# Altium PCB STM32F103ZET6.PCBDOC (part 5 of 5)
Units mil, origin at the board's own origin, x right, y up, seen from the top; angles counter-clockwise.
Board outline 7118.03 x 3660.03 mil, 2 copper layers (Top Layer, Bottom Layer); 158 components, 198 nets, 727 pads, 128 vias.
Unrouted connection lines stored in the file: 5.
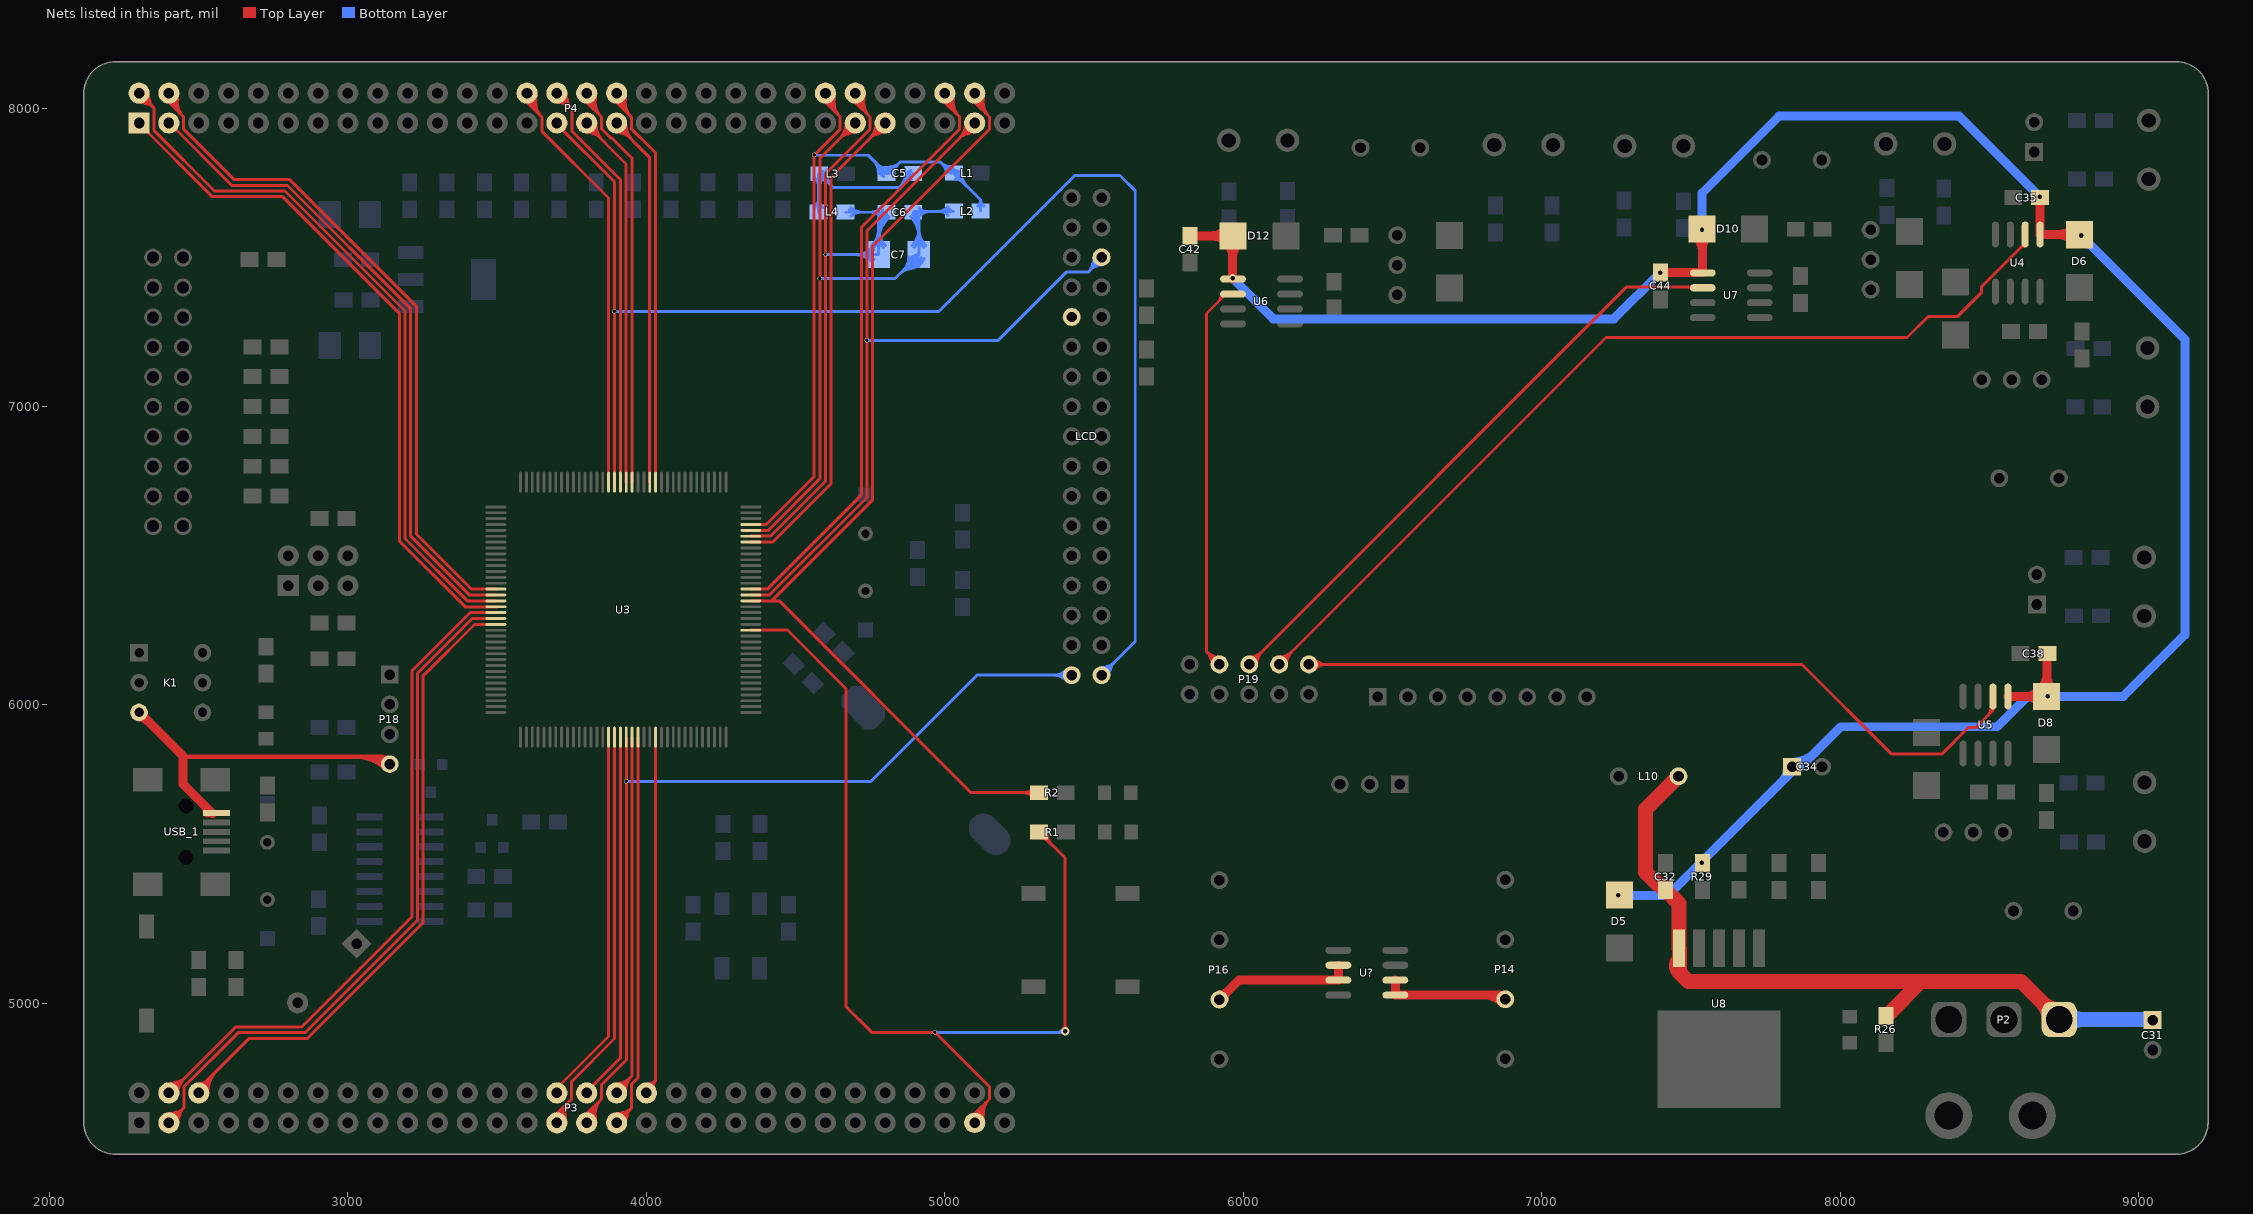
[diagram p5: the nets of this part, all layers, seen from the top]

## Via types
v1: diameter 15, hole 12, Top Layer to Bottom Layer, 57 vias
v2: diameter 28, hole 15, Top Layer to Bottom Layer, 53 vias
v3: diameter 50, hole 28, Top Layer to Bottom Layer, 10 vias
v4: diameter 12, hole 10, Top Layer to Bottom Layer, 4 vias
v5: diameter 20, hole 15, Top Layer to Bottom Layer, 2 vias
v6: diameter 48, hole 28, Top Layer to Bottom Layer, 1 vias
v7: diameter 40, hole 28, Top Layer to Bottom Layer, 1 vias

## Nets (pads, with @x,y where several pads share a name; then routed paths per layer and width w, separated by ;. In a path a pad name is that pad's centre, name@x,y a point inside that pad or via, vN(x,y) a via of type N, cw(c..) or ccw(c..) an arc to the next point about the centre after c; other vN are vias at no path point) (continued)
PF5: P3.57 R1.2 U3.15 | length 4291.4
  Top Layer w10: U3.15@4351,6251 4472.57,6251 4668,6055.57 4668,4989.83 4754.83,4903 v1(4966,4903) 4966.91,4903 5149.43,4720.48 5149.43,4679.52 ; P3.57@5100,4600 5100,4630.09 5149.43,4679.52 ; P3.57@5103.04,4598.9 ccw(c5063.09,4639.81) 5120.27,4639.14 ; P3.57@5110.03,4591.75 ccw(c5063.9,4638.98) 5129.92,4638.2 ; R1.2@5316,5574 5403,5487 v2@5403,4909 ; R1.2@5321,5574 cw(c5309.75,5535.44) 5348.55,5545.84 ; R1.2@5323.8,5583.6 cw(c5315.57,5555.4) R1.2@5343.95,5563 ; v2@5396.64,4913.36 ccw(c5381.27,4928.73) 5403,4928.73 ccw(c5424.73,4928.73) v2@5409.36,4913.36 ; v2@5403,4903 v2(5403,4907) ; 5149.43,4679.52 ccw(c5203.13,4625.82) 5129.55,4607.04 cw(c5203.13,4625.82) 5149.43,4679.52 ; v1@4966,4900.5 cw(c4966,4892.27) 4971.82,4898.09 ccw(c4966,4892.27) v1@4966,4900.5 ; P3.57@5100.48,4599.62 cw(c5143.78,4610.67) 5112.18,4642.27 ccw(c5143.78,4610.67) P3.57@5100.48,4599.62 ; P3.57@5110.17,4602.09 cw(c5163.56,4615.72) 5124.6,4654.69 ccw(c5163.56,4615.72) P3.57@5110.17,4602.09 ; P3.57@5119.86,4604.57 cw(c5183.34,4620.77) 5137.01,4667.11 ccw(c5183.34,4620.77) P3.57@5119.86,4604.57 ; R1.2@5321,5554 cw(c5321,5517.79) 5346.61,5543.39 ccw(c5321,5517.79) R1.2@5321,5554 ; R1.2@5331,5574 ccw(c5367.21,5574) 5341.61,5548.39 cw(c5367.21,5574) R1.2@5331,5574 ; R1.2@5341,5574 ccw(c5401.36,5574) 5358.68,5531.32 cw(c5401.36,5574) R1.2@5341,5574
  Bottom Layer w10: v1(4966,4903) 5398,4903 v2@5402,4907 ; 5371.62,4903 ccw(c5371.62,4938.38) v2@5396.64,4913.36
PF8: P4.58 R2.2 U3.20 | length 4002
  Top Layer w10: U3.20@4350,6349 4419.61,6349 4758,6687.39 4758,7538.09 5149.43,7929.52 5149.43,7970.48 ; 4422,6349 4445,6349 5088,5706 R2.2@5315,5706 ; P4.58@5100,8050 5100,8019.91 5149.43,7970.48 ; P4.58@5106.66,8056.87 cw(c5052.87,8001.4) 5130.13,8002.59 ; P4.58@5113.62,8064.05 cw(c5076.64,8025.91) 5129.76,8026.73 ; 5149.43,7970.48 cw(c5203.04,8024.09) 5129.51,8042.58 ccw(c5203.04,8024.09) 5149.43,7970.48 ; 5261.72,5706 cw(c5261.72,5657.72) 5295.86,5691.86 ccw(c5261.72,5657.72) 5261.72,5706 ; 5261.72,5706 ccw(c5261.72,5754.28) 5295.86,5720.14 cw(c5261.72,5754.28) 5261.72,5706 ; P4.58@5100.42,8049.89 ccw(c5143.26,8039.12) 5112.02,8007.88 cw(c5143.26,8039.12) P4.58@5100.42,8049.89 ; P4.58@5110.12,8047.46 ccw(c5163.19,8034.11) 5124.49,7995.42 cw(c5163.19,8034.11) P4.58@5110.12,8047.46 ; P4.58@5119.82,8045.02 ccw(c5183.11,8029.1) 5136.96,7982.95 cw(c5183.11,8029.1) P4.58@5119.82,8045.02
PF9: LCD.30 P4.57 U3.21 | length 3706.1
  Top Layer w10: U3.21@4349.89,6368.64 4350.25,6369 4412.74,6369 4739,6695.26 4739,7589 P4.57@5100,7950 ; 5060.98,7909.11 ccw(c5047.12,7960.83) P4.57@5099.58,7950.09 ; 5076.61,7913.3 ccw(c5064.85,7957.2) P4.57@5109.37,7948.08 ; 5048.05,7898.05 cw(c5100,7846.1) 5100,7919.57 ccw(c5100,7846.1) 5048.05,7898.05 ; 5048.05,7898.05 ccw(c4996.1,7950) 5069.57,7950 cw(c4996.1,7950) 5048.05,7898.05 ; 5065.12,7915.12 cw(c5100,7880.24) 5100,7929.57 ccw(c5100,7880.24) 5065.12,7915.12 ; 5065.12,7915.12 ccw(c5030.24,7950) 5079.57,7950 cw(c5030.24,7950) 5065.12,7915.12 ; v1@4736.23,7220.23 cw(c4729.55,7213.55) 4739,7213.55 ccw(c4729.55,7213.55) v1@4736.23,7220.23 ; v1@4736.23,7223.77 ccw(c4729.55,7230.45) 4739,7230.45 cw(c4729.55,7230.45) v1@4736.23,7223.77
  Bottom Layer w10: v1(4738,7222) 5178.87,7222 5406.87,7450 5480,7450 5525,7495 LCD.30@5525,7500 ; 5493.35,7472.79 cw(c5536.86,7461.97) LCD.30@5523.51,7504.77 ; 5503.67,7469.28 ccw(c5494.39,7503.93) LCD.30@5529.96,7499.36 ; 5480,7450 ccw(c5431.69,7498.32) 5500,7499.55 cw(c5431.69,7498.32) 5480,7450 ; 5490.86,7460.86 cw(c5525,7426.72) 5525,7475 ccw(c5525,7426.72) 5490.86,7460.86 ; 5496.65,7466.65 ccw(c5464.39,7498.91) 5510,7499.73 cw(c5464.39,7498.91) 5496.65,7466.65
PF10: P4.56 U3.22 | length 2602.9
  Top Layer w10: U3.22@4349,6388 4404.87,6388 4720,6703.13 4720,7600.09 5049.43,7929.52 5049.43,7970.48 ; P4.56@5000,8050 5000,8019.91 5049.43,7970.48 ; P4.56@5006.66,8056.87 cw(c4952.87,8001.4) 5030.13,8002.59 ; P4.56@5013.62,8064.05 cw(c4976.64,8025.91) 5029.76,8026.73 ; 5049.43,7970.48 cw(c5103.04,8024.09) 5029.51,8042.58 ccw(c5103.04,8024.09) 5049.43,7970.48 ; P4.56@5000.42,8049.89 ccw(c5043.26,8039.12) 5012.02,8007.88 cw(c5043.26,8039.12) P4.56@5000.42,8049.89 ; P4.56@5010.12,8047.46 ccw(c5063.19,8034.11) 5024.49,7995.42 cw(c5063.19,8034.11) P4.56@5010.12,8047.46 ; P4.56@5019.82,8045.02 ccw(c5083.11,8029.1) 5036.96,7982.95 cw(c5083.11,8029.1) P4.56@5019.82,8045.02
PF11: P4.34 U3.49 | length 1956
  Top Layer w10: P4.34@3900,8050 3900,8019.91 3949.43,7970.48 ; P4.34@3906.66,8056.87 cw(c3852.87,8001.4) 3930.13,8002.59 ; P4.34@3913.62,8064.05 cw(c3876.64,8025.91) 3929.76,8026.73 ; U3.49@4030.06,6746 4030.06,7850.94 3980.43,7900.57 3979.52,7900.57 3949.43,7930.66 3949.43,7970.48 ; 3949.43,7970.48 cw(c4003.04,8024.09) 3929.51,8042.58 ccw(c4003.04,8024.09) 3949.43,7970.48 ; P4.34@3900.42,8049.89 ccw(c3943.26,8039.12) 3912.02,8007.88 cw(c3943.26,8039.12) P4.34@3900.42,8049.89 ; P4.34@3910.12,8047.46 ccw(c3963.19,8034.11) 3924.49,7995.42 cw(c3963.19,8034.11) P4.34@3910.12,8047.46 ; P4.34@3919.82,8045.02 ccw(c3983.11,8029.1) 3936.96,7982.95 cw(c3983.11,8029.1) P4.34@3919.82,8045.02
PF12: P4.33 U3.50 | length 1685
  Top Layer w10: P4.33@3890.53,7948.65 ccw(c3932.31,7954.6) 3921.39,7913.84 ; P4.33@3900,7950 3900,7945 4011,7834 U3.50@4011,6746 ; P4.33@3900,7919.57 cw(c3900,7858.17) 3943.42,7901.58 ccw(c3900,7858.17) P4.33@3900,7919.57 ; P4.33@3900,7929.57 cw(c3900,7892.31) 3926.35,7918.65 ccw(c3900,7892.31) P4.33@3900,7929.57 ; P4.33@3920.43,7950 ccw(c3981.83,7950) 3938.42,7906.58 cw(c3981.83,7950) P4.33@3920.43,7950 ; P4.33@3930.43,7950 ccw(c4015.98,7950) 3955.49,7889.51 cw(c4015.98,7950) P4.33@3930.43,7950
PF13: P4.32 U3.53 | length 1966.9
  Top Layer w10: P4.32@3800,8050 3800,8019.91 3849.43,7970.48 ; P4.32@3806.66,8056.87 cw(c3752.87,8001.4) 3830.13,8002.59 ; P4.32@3813.62,8064.05 cw(c3776.64,8025.91) 3829.76,8026.73 ; U3.53@3952,6746 3952,7832 3883.43,7900.57 3879.52,7900.57 3849.43,7930.66 3849.43,7970.48 ; 3849.43,7970.48 cw(c3903.04,8024.09) 3829.51,8042.58 ccw(c3903.04,8024.09) 3849.43,7970.48 ; P4.32@3800.42,8049.89 ccw(c3843.26,8039.12) 3812.02,8007.88 cw(c3843.26,8039.12) P4.32@3800.42,8049.89 ; P4.32@3810.12,8047.46 ccw(c3863.19,8034.11) 3824.49,7995.42 cw(c3863.19,8034.11) P4.32@3810.12,8047.46 ; P4.32@3819.82,8045.02 ccw(c3883.11,8029.1) 3836.96,7982.95 cw(c3883.11,8029.1) P4.32@3819.82,8045.02
PF14: P4.31 U3.54 | length 1693.7
  Top Layer w10: P4.31@3790.53,7948.65 ccw(c3832.31,7954.6) 3821.39,7913.84 ; P4.31@3800,7950 3800,7945 3932,7813 U3.54@3932,6746 ; P4.31@3800,7919.57 cw(c3800,7858.17) 3843.42,7901.58 ccw(c3800,7858.17) P4.31@3800,7919.57 ; P4.31@3800,7929.57 cw(c3800,7892.31) 3826.35,7918.65 ccw(c3800,7892.31) P4.31@3800,7929.57 ; P4.31@3820.43,7950 ccw(c3881.83,7950) 3838.42,7906.58 cw(c3881.83,7950) P4.31@3820.43,7950 ; P4.31@3830.43,7950 ccw(c3915.98,7950) 3855.49,7889.51 cw(c3915.98,7950) P4.31@3830.43,7950
PF15: P4.30 U3.55 | length 1857.9
  Top Layer w10: P4.30@3690.76,8047.51 ccw(c3736.63,8059.87) 3725.6,8013.67 ; P4.30@3700,8050 3750,8000 3750,7922.87 3913,7759.87 U3.55@3913,6746 ; P4.30@3702.49,8059.24 cw(c3690.13,8013.37) 3736.33,8024.4 ; 3733.57,8016.43 cw(c3765.34,8048.2) 3720.43,8049.44 ccw(c3765.34,8048.2) 3733.57,8016.43 ; 3733.57,8016.43 ccw(c3701.8,7984.66) 3700.56,8029.57 cw(c3701.8,7984.66) 3733.57,8016.43 ; 3750,8000 cw(c3797.32,8047.32) 3730.42,8049.16 ccw(c3797.32,8047.32) 3750,8000 ; 3750,8000 ccw(c3702.68,7952.68) 3700.84,8019.58 cw(c3702.68,7952.68) 3750,8000
PG0: LCD.2 P4.29 U3.56 | length 5298.5
  Top Layer w10: P4.29@3700,7950 3700,7946 3893,7753 U3.56@3893,6747
  Bottom Layer w10: v1(3893,7319) 4980,7319 5435,7774 5587,7774 5638,7723 5638,6213 LCD.2@5525,6100 ; LCD.2@5520.1,6101 cw(c5558.94,6093.05) 5548.68,6131.35 ; LCD.2@5526,6095.1 ccw(c5518.05,6133.94) 5556.35,6123.68 ; 5550.61,6125.61 cw(c5525,6151.21) 5525,6115 ccw(c5525,6151.21) 5550.61,6125.61 ; 5550.61,6125.61 ccw(c5576.21,6100) 5540,6100 cw(c5576.21,6100) 5550.61,6125.61 ; 5567.68,6142.68 cw(c5525,6185.36) 5525,6125 ccw(c5525,6185.36) 5567.68,6142.68 ; 5567.68,6142.68 ccw(c5610.36,6100) 5550,6100 cw(c5610.36,6100) 5567.68,6142.68
PG1: P4.28 U3.57 | length 2014.7
  Top Layer w10: P4.28@3600,8050 3600,8019.91 3649.43,7970.48 ; P4.28@3606.66,8056.87 cw(c3552.87,8001.4) 3630.13,8002.59 ; P4.28@3613.62,8064.05 cw(c3576.64,8025.91) 3629.76,8026.73 ; U3.57@3873,6746 3873,7699 3649.43,7922.57 3649.43,7970.48 ; 3649.43,7970.48 cw(c3703.04,8024.09) 3629.51,8042.58 ccw(c3703.04,8024.09) 3649.43,7970.48 ; P4.28@3600.42,8049.89 ccw(c3643.26,8039.12) 3612.02,8007.88 cw(c3643.26,8039.12) P4.28@3600.42,8049.89 ; P4.28@3610.12,8047.46 ccw(c3663.19,8034.11) 3624.49,7995.42 cw(c3663.19,8034.11) P4.28@3610.12,8047.46 ; P4.28@3619.82,8045.02 ccw(c3683.11,8029.1) 3636.96,7982.95 cw(c3683.11,8029.1) P4.28@3619.82,8045.02
PG2: P4.4 U3.87 | length 2871.4
  Top Layer w10: P4.4@2400,8050 2400,8019.91 2449.43,7970.48 ; P4.4@2406.66,8056.87 cw(c2352.87,8001.4) 2430.13,8002.59 ; P4.4@2413.62,8064.05 cw(c2376.64,8025.91) 2429.76,8026.73 ; U3.87@3497,6388 3414.3,6388 3229,6573.3 3229,7335.91 2804.91,7760 2618.87,7760 2449.43,7929.44 2449.43,7970.48 ; 2449.43,7970.48 cw(c2503.04,8024.09) 2429.51,8042.58 ccw(c2503.04,8024.09) 2449.43,7970.48 ; P4.4@2400.42,8049.89 ccw(c2443.26,8039.12) 2412.02,8007.88 cw(c2443.26,8039.12) P4.4@2400.42,8049.89 ; P4.4@2410.12,8047.46 ccw(c2463.19,8034.11) 2424.49,7995.42 cw(c2463.19,8034.11) P4.4@2410.12,8047.46 ; P4.4@2419.82,8045.02 ccw(c2483.11,8029.1) 2436.96,7982.95 cw(c2483.11,8029.1) P4.4@2419.82,8045.02
PG3: P4.3 U3.88 | length 2197.6
  Top Layer w10: P4.3@2400,7950 2402,7950 2611,7741 2797.04,7741 3210,7328.04 3210,6565.43 3406.43,6369 U3.88@3496,6369
PG4: P4.2 U3.89 | length 2862.9
  Top Layer w10: P4.2@2290.72,8047.69 ccw(c2336.11,8058.98) 2324.88,8013.56 ; P4.2@2300,8050 2350.57,7999.43 ; P4.2@2302.31,8059.28 cw(c2291.02,8013.89) 2336.44,8025.12 ; U3.89@3496,6349 3399.56,6349 3191,6557.56 3191,7320.17 2789.17,7722 2552.87,7722 2350.57,7924.3 2350.57,7999.43 ; 2333.95,8016.05 cw(c2366.61,8048.71) 2320.43,8049.6 ccw(c2366.61,8048.71) 2333.95,8016.05 ; 2333.95,8016.05 ccw(c2301.29,7983.39) 2300.4,8029.57 cw(c2301.29,7983.39) 2333.95,8016.05 ; 2350.56,7999.44 cw(c2399.21,8048.08) 2330.43,8049.41 ccw(c2399.21,8048.08) 2350.56,7999.44 ; 2350.56,7999.44 ccw(c2301.92,7950.79) 2300.59,8019.57 cw(c2301.92,7950.79) 2350.56,7999.44
PG5: P4.1 U3.90 | length 2318.3
  Top Layer w10: P4.1@2300,7950 2300,7948 2545,7703 2781.3,7703 3172,7312.3 3172,6549.69 3392.69,6329 U3.90@3499,6329
PG6: P3.4 U3.91 | length 2742.3
  Top Layer w10: P3.4@2390.7,4702.26 cw(c2437.01,4691.02) 2424.68,4737.04 ; P3.4@2400,4700 2403.22,4700 2624.22,4921 2845,4921 3214,5290 3214,6114 3410,6310 U3.91@3495,6310 ; P3.4@2400.42,4699.9 cw(c2455.67,4686.49) 2440.96,4741.41 ; P3.4@2400,4720.43 ccw(c2400,4777.54) 2440.38,4737.16 cw(c2400,4777.54) P3.4@2400,4720.43 ; P3.4@2400,4730.43 ccw(c2400,4811.68) 2457.45,4754.23 cw(c2400,4811.68) P3.4@2400,4730.43 ; P3.4@2420.43,4700 cw(c2461.99,4700) 2432.6,4729.38 ccw(c2461.99,4700) P3.4@2420.43,4700 ; P3.4@2430.43,4700 cw(c2496.13,4700) 2449.67,4746.45 ccw(c2496.13,4700) P3.4@2430.43,4700
PG7: P3.3 U3.92 | length 2792.2
  Top Layer w10: P3.3@2390.72,4602.31 cw(c2436.11,4591.02) 2424.88,4636.44 ; P3.3@2400,4600 2450.57,4650.57 ; P3.3@2402.31,4590.72 ccw(c2391.02,4636.11) 2436.44,4624.88 ; U3.92@3495,6290 3416.87,6290 3233,6106.13 3233,5278.83 2856.17,4902 2632.09,4902 2450.57,4720.48 2450.57,4650.57 ; 2433.95,4633.95 cw(c2401.29,4666.61) 2400.4,4620.43 ccw(c2401.29,4666.61) 2433.95,4633.95 ; 2433.95,4633.95 ccw(c2466.61,4601.29) 2420.43,4600.4 cw(c2466.61,4601.29) 2433.95,4633.95 ; 2450.56,4650.56 cw(c2401.92,4699.21) 2400.59,4630.43 ccw(c2401.92,4699.21) 2450.56,4650.56 ; 2450.56,4650.56 ccw(c2499.21,4601.92) 2430.43,4600.59 cw(c2499.21,4601.92) 2450.56,4650.56
PG8: P3.6 U3.93 | length 2729.9
  Top Layer w10: P3.6@2490.43,4700.16 cw(c2527.34,4699.55) 2517.79,4735.2 ; P3.6@2497.76,4710.19 ccw(c2488.01,4754.57) 2531.9,4742.81 ; P3.6@2499.91,4700.42 ccw(c2491.98,4736.49) 2527.65,4726.93 ; P3.6@2500,4700 2500,4714 2669,4883 2864.04,4883 3252,5270.96 3252,6098.26 3423.74,6270 U3.93@3495,6270 ; P3.6@2500,4730.43 ccw(c2500,4770.11) 2528.05,4742.05 cw(c2500,4770.11) P3.6@2500,4730.43 ; P3.6@2510.43,4700 cw(c2569.42,4700) 2527.71,4741.71 ccw(c2569.42,4700) P3.6@2510.43,4700 ; P3.6@2520.43,4700 cw(c2603.56,4700) 2544.78,4758.78 ccw(c2603.56,4700) P3.6@2520.43,4700 ; P3.6@2530.43,4700 cw(c2637.7,4700) 2561.85,4775.85 ccw(c2637.7,4700) P3.6@2530.43,4700
PG9: P3.30 U3.124 | length 1264.5
  Top Layer w10: P3.30@3700,4700 3699,4701 3699,4715 3873,4889 U3.124@3873,5892
PG10: P3.29 U3.125 | length 1969.6
  Top Layer w10: P3.29@3700,4600 3700,4630.09 3749.43,4679.52 ; P3.29@3706.66,4593.13 ccw(c3652.87,4648.6) 3730.13,4647.41 ; P3.29@3713.62,4585.95 ccw(c3676.64,4624.09) 3729.76,4623.27 ; U3.125@3893,5892 3893,4882.13 3749.43,4738.56 3749.43,4679.52 ; 3749.43,4679.52 ccw(c3803.04,4625.91) 3729.51,4607.42 cw(c3803.04,4625.91) 3749.43,4679.52 ; P3.29@3700.42,4600.11 cw(c3743.26,4610.88) 3712.02,4642.12 ccw(c3743.26,4610.88) P3.29@3700.42,4600.11 ; P3.29@3710.12,4602.54 cw(c3763.19,4615.89) 3724.49,4654.58 ccw(c3763.19,4615.89) P3.29@3710.12,4602.54 ; P3.29@3719.82,4604.98 cw(c3783.11,4620.9) 3736.96,4667.05 ccw(c3783.11,4620.9) P3.29@3719.82,4604.98
PG11: P3.32 U3.126 | length 1239.8
  Top Layer w10: P3.32@3800,4700 3800,4705 3913,4818 U3.126@3913,5893
PG12: LCD.1 P3.31 U3.127 | length 3888.5
  Top Layer w10: P3.31@3800,4600 3800,4630.09 3849.43,4679.52 ; P3.31@3806.66,4593.13 ccw(c3752.87,4648.6) 3830.13,4647.41 ; P3.31@3813.62,4585.95 ccw(c3776.64,4624.09) 3829.76,4623.27 ; U3.127@3933,5893 3933,4811.13 3849.43,4727.56 3849.43,4679.52 ; 3849.43,4679.52 ccw(c3903.04,4625.91) 3829.51,4607.42 cw(c3903.04,4625.91) 3849.43,4679.52 ; P3.31@3800.42,4600.11 cw(c3843.26,4610.88) 3812.02,4642.12 ccw(c3843.26,4610.88) P3.31@3800.42,4600.11 ; P3.31@3810.12,4602.54 cw(c3863.19,4615.89) 3824.49,4654.58 ccw(c3863.19,4615.89) P3.31@3810.12,4602.54 ; P3.31@3819.82,4604.98 cw(c3883.11,4620.9) 3836.96,4667.05 ccw(c3883.11,4620.9) P3.31@3819.82,4604.98
  Bottom Layer w10: v1(3933,5744) 4751.87,5744 5107.87,6100 LCD.1@5425,6100 ; 5364.64,6100 cw(c5364.64,6039.64) 5407.32,6082.32 ccw(c5364.64,6039.64) 5364.64,6100 ; 5364.64,6100 ccw(c5364.64,6160.36) 5407.32,6117.68 cw(c5364.64,6160.36) 5364.64,6100 ; 5388.79,6100 cw(c5388.79,6063.79) 5414.39,6089.39 ccw(c5388.79,6063.79) 5388.79,6100 ; 5388.79,6100 ccw(c5388.79,6136.21) 5414.39,6110.61 cw(c5388.79,6136.21) 5388.79,6100
PG13: P3.34 U3.128 | length 1662.8
  Top Layer w10: P3.34@3890.51,4701.23 cw(c3931.75,4695.89) 3920.99,4736.06 ; P3.34@3899.91,4700.42 ccw(c3892.61,4733.53) 3925.78,4726.52 ; P3.34@3900,4700 3903,4703 3903,4709 3952,4758 ; U3.128@3952,5891 3952,4758 ; 3952,4758 ccw(c4004.42,4705.58) 3930.39,4701.62 cw(c4004.42,4705.58) 3952,4758 ; P3.34@3900,4720.43 ccw(c3900,4755.28) 3924.64,4730.64 cw(c3900,4755.28) P3.34@3900,4720.43 ; P3.34@3900,4730.43 ccw(c3900,4789.42) 3941.71,4747.71 cw(c3900,4789.42) P3.34@3900,4730.43 ; P3.34@3920.4,4701.09 cw(c3974.31,4703.97) 3936.14,4742.14 ccw(c3974.31,4703.97) P3.34@3920.4,4701.09
PG14: P3.33 U3.129 | length 1792.4
  Top Layer w10: P3.33@3890.72,4602.31 cw(c3936.11,4591.02) 3924.88,4636.44 ; P3.33@3900,4600 3950.57,4650.57 ; P3.33@3902.31,4590.72 ccw(c3891.02,4636.11) 3936.44,4624.88 ; U3.129@3972,5891 3972,4751.13 3950.57,4729.7 3950.57,4650.57 ; 3933.95,4633.95 cw(c3901.29,4666.61) 3900.4,4620.43 ccw(c3901.29,4666.61) 3933.95,4633.95 ; 3933.95,4633.95 ccw(c3966.61,4601.29) 3920.43,4600.4 cw(c3966.61,4601.29) 3933.95,4633.95 ; 3950.56,4650.56 cw(c3901.92,4699.21) 3900.59,4630.43 ccw(c3901.92,4699.21) 3950.56,4650.56 ; 3950.56,4650.56 ccw(c3999.21,4601.92) 3930.43,4600.59 cw(c3999.21,4601.92) 3950.56,4650.56
PG15: P3.36 U3.132 | length 1430.3
  Top Layer w10: P3.36@3990.6,4701.77 cw(c4032.21,4693.93) 4022.97,4735.26 ; P3.36@4000,4700 4000,4711 4031,4742 ; U3.132@4031,5893 4031,4742 ; 4031,4742 cw(c4002.93,4770.07) 4001.27,4730.41 ccw(c4002.93,4770.07) 4031,4742 ; 4031,4742 ccw(c4047.64,4725.36) 4026.86,4714.3 cw(c4047.64,4725.36) 4031,4742 ; P3.36@4018.04,4709.6 cw(c4035.17,4718.72) 4021.45,4732.45 ccw(c4035.17,4718.72) P3.36@4018.04,4709.6
PWM1: P19.4 U4.2 | length 3295.3
  Top Layer w10: P19.4@6120,6136 7215,7231 8224,7231 8294,7301 8392,7301 8474,7383 8474,7401.87 8590.13,7518 8590.13,7518.13 8620,7548 U4.2@8620,7576.47 U4.2@8620,7577 ; P19.4@6120,6151 ccw(c6120,6187.21) 6145.61,6161.61 ccw(c6171.21,6136) P19.4@6135,6136 ; P19.4@6120,6161 ccw(c6120,6221.36) 6162.68,6178.68 ccw(c6205.36,6136) P19.4@6145,6136 ; 8603.21,7531.21 cw(c8620,7514.42) U4.2@8620,7538.17
PWM2: P19.5 U5.2 | length 2764.6
  Top Layer w10: P19.5@6220,6136 7872,6136 8173,5835 8340,5835 8430,5925 8455.2,5925 8512,5981.8 ; P19.5@6230.61,6125.39 cw(c6256.21,6099.79) 6256.21,6136 cw(c6256.21,6172.21) P19.5@6230.61,6146.61 ; P19.5@6237.68,6118.32 cw(c6280.36,6075.64) 6280.36,6136 cw(c6280.36,6196.36) P19.5@6237.68,6153.68 ; 8489.64,5959.44 ccw(c8452.11,5996.98) U5.2@8505.19,5996.98 ; 8506.71,5976.51 ccw(c8486.25,5996.98) U5.2@8515.19,5996.98 ; U5.2@8507.47,5991.89 cw(c8498.5,5981.8) 8512,5981.8 ; U5.2@8512,6030 U5.2@8512,6028.47 8512,5981.8 ; U5.2@8516.53,5991.89 ccw(c8525.5,5981.8) 8512,5981.8
PWM3: P19.2 U6.2 | length 1486.4
  Top Layer w10: P19.2@5895,6136 ccw(c5834.64,6136) 5877.32,6178.68 ccw(c5920,6221.36) P19.2@5920,6161 ; P19.2@5905,6136 ccw(c5868.79,6136) 5894.39,6161.61 ccw(c5920,6187.21) P19.2@5920,6151 ; 5916.77,7351.77 ccw(c5891.54,7377) U6.2@5927.22,7377 ; P19.2@5920,6136 5877,6179 5877,7312 5942,7377 U6.2@5963,7377
PWM4: P19.3 U7.2 | length 2216.6
  Top Layer w10: P19.3@6020,6136 7285,7401 7539,7401 U7.2@7539,7400 ; P19.3@6020,6151 ccw(c6020,6187.21) 6045.61,6161.61 ccw(c6071.21,6136) P19.3@6035,6136 ; P19.3@6020,6161 ccw(c6020,6221.36) 6062.68,6178.68 ccw(c6105.36,6136) P19.3@6045,6136 ; 7484.35,7401 cw(c7484.35,7374.31) U7.2@7503.22,7393.18
USB_VCC: K1.3 P18.4 USB_1.1 | length 1557.8
  Top Layer w15.75: 2447,5827 2448,5827 3115,5827 ; 3027.37,5827 cw(c3027.37,5689.37) P18.4@3124.69,5786.69 ; 3065.39,5827 cw(c3065.39,5727.39) P18.4@3135.82,5797.82 ; 3103.41,5827 cw(c3103.41,5765.41) P18.4@3146.96,5808.96 ; P18.4@3119.4,5808.68 ccw(c3102.25,5814.25) 3115,5827 ; P18.4@3133.32,5822.6 cw(c3127.75,5839.75) 3115,5827 ; P18.4@3140,5802 3115,5827
  Top Layer w30: K1.3@2300,5975 2447.5,5827.5 ; 2448,5827 2448,5735 USB_1.1@2546,5637 ; 2517.31,5665.69 cw(c2489.6,5637.99) USB_1.1@2528.78,5637.99 ; 2324.8,5950.2 cw(c2349.6,5975) 2314.53,5975 ccw(c2349.6,5975) 2324.8,5950.2 ; 2324.8,5950.2 ccw(c2300,5925.4) 2300,5960.47 cw(c2300,5925.4) 2324.8,5950.2
VCC3.3: LCD.25
VCC7.2: C31.1 C32.2 L10.1 P2.3 R26.2 U8.5 | length 2966.6
  Top Layer w50: C32.2@7410,5382 7392,5400 7387.57,5400 ; C32.2@7415,5385 ccw(c7387.57,5367.43) 7387.57,5400 ; C32.2@7416,5380 7416,5379 7460.14,5334.86 U8.5@7460.14,5184.22 ; U8.5@7455.81,5141.9 ccw(c7537.21,5141.9) 7479.65,5084.34 ; U8.5@7456.45,5144.15 ccw(c7485.33,5126.52) 7461.4,5102.59 ; L10.1@7458,5761 7348,5651 7348,5439.57 7387.57,5400 ; U8.5@7460,5184 7461.4,5182.6 7461.4,5102.59 ; R26.2@8156,4958 8272,5074 ; P2.3@8699.94,4946 ccw(c8617.73,4946) 8675.86,5004.14 ccw(c8734,5062.27) P2.3@8734,4980.06 ; P2.3@8734,4946 8606,5074 8272,5074 ; 7461.4,5102.59 7490.99,5073 8271,5073 8272,5074
  Bottom Layer w50: P2.3@8734,4946 9048,4946 C31.1@9049,4945 ; P2.3@8758.08,4921.92 cw(c8816.22,4863.78) 8816.22,4946 cw(c8816.22,5028.22) P2.3@8758.08,4970.08
VCC12: C34.1 C35.1 C38.1 C42.1 C44.1 D5.2 D6.1 D8.1 D10.1 D12.1 R29.1 U4.1 U5.1 U6.1 U7.1 | length 8732.5
  Top Layer w30: C42.1@5822,7572 5963,7572 5964,7571 v2(5964,7430) U6.1@5964,7427 ; D12.1@5944.01,7593.41 cw(c5892.33,7645.09) 5892.33,7572 cw(c5892.33,7498.91) 5944.01,7550.59 cw(c5895.75,7502.33) 5964,7502.33 ; 5964,7495.49 cw(c6041.93,7495.49) D12.1@5986.83,7550.59 ; C44.1@7398,7449 7539,7449 D10.1@7539,7595 ; D10.1@7515.01,7573.59 cw(c7457.09,7515.67) 7539,7515.67 ; 7539,7528.14 cw(c7603.27,7528.14) D10.1@7557.83,7573.59 ; U5.1@8562,6028.47 8692.53,6028.47 8693,6028 8693,6168 C38.1@8696,6171 ; 8617.64,6028.47 ccw(c8617.64,6101.94) 8669.59,6049.99 ccw(c8613.08,6106.5) 8693,6106.5 ; 8618.17,6028.47 cw(c8618.17,5955.76) D8.1@8669.59,6007.17 ; C35.1@8670,7700 8670,7577 D6.1@8800,7577 ; 8693,6096.85 ccw(c8759.26,6096.85) D8.1@8712.41,6049.99 ; 8693,6145.44 cw(c8720.56,6145.44) C38.1@8701.07,6164.93 ; 8725.49,7577 cw(c8725.49,7499.07) D6.1@8780.59,7554.17 ; 8732.33,7577 ccw(c8732.33,7645.25) D6.1@8780.59,7596.99
  Bottom Layer w30: v2(5964,7430) 6100,7294 7242,7294 v2(7397,7449) ; v2(7256,5362) 7424,5362 7841,5779 C34.1@7841,5793 ; v2@7537,7595 7537,7715 7795,7973 8399,7973 v2(8669,7703) ; 7802.08,5740.08 ccw(c7749.16,5793) C34.1@7824,5793 ; C34.1@7839,5793 7868.29,5793 8002.29,5927 8526,5927 8627,6028 v2@8698,6028 ; C34.1@7839,5808 ccw(c7839,5914.92) 7914.61,5839.32 ; v2(8696,6029) 8949,6029 9155,6235 9155,7225 v2@8808,7572
  other v2: 7536,5472 8807,7573 8807,7574 7537,7593
VDDA: C5.1 L1.1 L2.2 P4.48 U3.33 | length 4208.8
  Top Layer w10: U3.33@4350.68,6605.11 4357.87,6605.11 4357.98,6605 4401.48,6605 4562,6765.52 4562,7842.09 4649.43,7929.52 4649.43,7970.48 ; P4.48@4600,8050 4600,8019.91 4649.43,7970.48 ; P4.48@4606.66,8056.87 cw(c4552.87,8001.4) 4630.13,8002.59 ; P4.48@4613.62,8064.05 cw(c4576.64,8025.91) 4629.76,8026.73 ; 4649.43,7970.48 cw(c4703.04,8024.09) 4629.51,8042.58 ccw(c4703.04,8024.09) 4649.43,7970.48 ; 4562,7834.55 cw(c4571.45,7834.55) 4564.77,7841.23 ccw(c4571.45,7834.55) 4562,7834.55 ; P4.48@4600.42,8049.89 ccw(c4643.26,8039.12) 4612.02,8007.88 cw(c4643.26,8039.12) P4.48@4600.42,8049.89 ; P4.48@4610.12,8047.46 ccw(c4663.19,8034.11) 4624.49,7995.42 cw(c4663.19,8034.11) P4.48@4610.12,8047.46 ; P4.48@4619.82,8045.02 ccw(c4683.11,8029.1) 4636.96,7982.95 cw(c4683.11,8029.1) P4.48@4619.82,8045.02
  Bottom Layer w10: v1@4562,7842 4743,7842 C5.1@4803,7782 ; 4771.45,7809.16 ccw(c4810.25,7819.56) C5.1@4799,7781 ; C5.1@4776.05,7792 ccw(c4804.43,7799.6) C5.1@4796.2,7771.4 ; C5.1@4799.32,7783.5 cw(c4826.76,7776.42) C5.1@4819.42,7803.79 ; C5.1@4804,7781 C5.1@4803,7782 ; 4835.27,7804.42 cw(c4804.31,7812.72) 4809,7781 cw(c4845.82,7771.5) 4835.98,7808.23 ; 4998.02,7809.23 cw(c4988.18,7772.5) 5025,7782 cw(c5029.69,7813.72) 4998.73,7805.42 ; L1.1@5014.58,7804.79 cw(c5007.24,7777.42) L1.1@5034.68,7784.5 ; L1.1@5035,7782 cw(c5023.75,7743.44) 5062.55,7753.84 ; L1.1@5037.8,7791.6 cw(c5029.57,7763.4) L1.1@5057.95,7771 ; L2.2@5120,7655 5120,7692 ; C5.1@4803,7782 4813,7782 4851,7820 4984,7820 5022,7782 L1.1@5030,7782 5120,7692 ; 5120,7692 cw(c5095.78,7692) 5109.05,7671.73 ccw(c5095.78,7692) 5120,7692 ; 5120,7692 ccw(c5144.22,7692) 5130.95,7671.73 cw(c5144.22,7692) 5120,7692 ; v1@4564.77,7844.77 ccw(c4571.45,7851.45) 4571.45,7842 cw(c4571.45,7851.45) v1@4564.77,7844.77 ; 4761.32,7823.68 cw(c4718.64,7781) 4779,7781 ccw(c4718.64,7781) 4761.32,7823.68 ; 4773.39,7811.61 ccw(c4799,7837.21) 4799,7801 cw(c4799,7837.21) 4773.39,7811.61 ; 4778.39,7806.61 cw(c4752.79,7781) 4789,7781 ccw(c4752.79,7781) 4778.39,7806.61 ; C5.1@4809,7791 ccw(c4809,7822.38) 4831.19,7800.19 cw(c4809,7822.38) C5.1@4809,7791 ; C5.1@4809,7801 ccw(c4809,7856.53) 4848.26,7817.26 cw(c4809,7856.53) C5.1@4809,7801 ; C5.1@4829,7781 cw(c4870.04,7781) 4841.02,7810.02 ccw(c4870.04,7781) C5.1@4829,7781 ; 4985.74,7818.26 ccw(c5025,7857.53) 5025,7802 cw(c5025,7857.53) 4985.74,7818.26 ; 4992.98,7811.02 cw(c4963.96,7782) 5005,7782 ccw(c4963.96,7782) 4992.98,7811.02 ; L1.1@5002.81,7801.19 ccw(c5025,7823.38) 5025,7792 cw(c5025,7823.38) L1.1@5002.81,7801.19 ; L1.1@5035,7762 cw(c5035,7725.79) 5060.61,7751.39 ccw(c5035,7725.79) L1.1@5035,7762 ; L1.1@5045,7782 ccw(c5081.21,7782) 5055.61,7756.39 cw(c5081.21,7782) L1.1@5045,7782 ; L1.1@5055,7782 ccw(c5115.36,7782) 5072.68,7739.32 cw(c5115.36,7782) L1.1@5055,7782
  other v1: 4563,7843
VREF+: C6.1 C7.1 L2.1 P4.49 U3.32 | length 4601.3
  Top Layer w10: U3.32@4351.11,6585 4408.35,6585 4581,6757.65 4581,7831 P4.49@4700,7950 ; 4660.98,7909.11 ccw(c4647.12,7960.83) P4.49@4699.58,7950.09 ; 4676.61,7913.3 ccw(c4664.85,7957.2) P4.49@4709.37,7948.08 ; 4648.05,7898.05 cw(c4700,7846.1) 4700,7919.57 ccw(c4700,7846.1) 4648.05,7898.05 ; 4648.05,7898.05 ccw(c4596.1,7950) 4669.57,7950 cw(c4596.1,7950) 4648.05,7898.05 ; 4665.12,7915.12 cw(c4700,7880.24) 4700,7929.57 ccw(c4700,7880.24) 4665.12,7915.12 ; 4665.12,7915.12 ccw(c4630.24,7950) 4679.57,7950 cw(c4630.24,7950) 4665.12,7915.12
  Bottom Layer w10: v1@4580,7429 4833,7429 C7.1@4913,7509 4913,7633 4895,7651 4898,7654 L2.1@5029,7654 ; 4863.34,7455.69 ccw(c4845.94,7520.64) C7.1@4910.6,7502.19 ; 4873.58,7475.66 cw(c4917.35,7463.93) C7.1@4912.14,7508.95 ; 4880.39,7460.26 ccw(c4865.73,7514.99) C7.1@4920.21,7499.44 ; C6.1@4893.82,7631.68 cw(c4889.86,7616.9) 4903.12,7624.55 ; C7.1@4897.44,7464.83 ccw(c4885.51,7509.35) C7.1@4929.83,7496.7 ; 4907.76,7616.51 cw(c4920.41,7623.81) C6.1@4911.37,7635.29 ; 4913,7570.82 cw(c4858.68,7570.82) 4897.09,7532.41 ccw(c4858.68,7570.82) 4913,7570.82 ; 4913,7570.82 ccw(c4967.32,7570.82) 4928.91,7532.41 cw(c4967.32,7570.82) 4913,7570.82 ; 4913,7594.96 cw(c4834.54,7594.96) 4890.02,7539.48 ccw(c4834.54,7594.96) 4913,7594.96 ; 4913,7594.96 ccw(c4991.46,7594.96) 4935.98,7539.48 cw(c4991.46,7594.96) 4913,7594.96 ; 4844.72,7440.72 cw(c4913,7372.43) 4913,7469 ccw(c4913,7372.43) 4844.72,7440.72 ; 4861.79,7457.79 cw(c4913,7406.57) 4913,7479 ccw(c4913,7406.57) 4861.79,7457.79 ; 4862.82,7458.82 ccw(c4820.14,7501.5) 4880.5,7501.5 cw(c4820.14,7501.5) 4862.82,7458.82 ; C7.1@4878.86,7474.86 cw(c4913,7440.72) 4913,7489 ccw(c4913,7440.72) C7.1@4878.86,7474.86 ; C7.1@4879.89,7475.89 ccw(c4854.29,7501.5) 4890.5,7501.5 cw(c4854.29,7501.5) C7.1@4879.89,7475.89 ; C6.1@4884.86,7636.86 cw(c4816.92,7568.92) 4913,7568.92 ccw(c4816.92,7568.92) C6.1@4884.86,7636.86 ; C6.1@4891.93,7643.93 cw(c4841.06,7593.06) 4913,7593.06 ccw(c4841.06,7593.06) C6.1@4891.93,7643.93 ; C6.1@4899,7651 cw(c4865.2,7617.2) 4913,7617.2 ccw(c4865.2,7617.2) C6.1@4899,7651 ; C6.1@4906.07,7643.93 cw(c4930.38,7619.62) 4930.38,7654 ccw(c4930.38,7619.62) C6.1@4906.07,7643.93 ; C6.1@4913.14,7636.86 cw(c4954.53,7595.47) 4954.53,7654 ccw(c4954.53,7595.47) C6.1@4913.14,7636.86 ; C6.1@4913.14,7665.14 ccw(c4940.04,7692.04) 4940.04,7654 cw(c4940.04,7692.04) C6.1@4913.14,7665.14 ; 4974.3,7654 ccw(c4974.3,7705.7) 5010.86,7669.14 cw(c4974.3,7705.7) 4974.3,7654 ; 4979.13,7654 cw(c4979.13,7609.13) 5010.86,7640.86 ccw(c4979.13,7609.13) 4979.13,7654 ; 4998.44,7654 ccw(c4998.44,7681.56) 5017.93,7662.07 cw(c4998.44,7681.56) 4998.44,7654
  other v1: 4581,7429
VREF-: C6.2 C7.2 L4.1 P4.50 U3.31 | length 4886.8
  Top Layer w10: U3.31@4348,6566 4416.22,6566 4600,6749.78 4600,7780.09 4749.43,7929.52 4749.43,7970.48 ; P4.50@4700,8050 4700,8019.91 4749.43,7970.48 ; P4.50@4706.66,8056.87 cw(c4652.87,8001.4) 4730.13,8002.59 ; P4.50@4713.62,8064.05 cw(c4676.64,8025.91) 4729.76,8026.73 ; 4749.43,7970.48 cw(c4803.04,8024.09) 4729.51,8042.58 ccw(c4803.04,8024.09) 4749.43,7970.48 ; P4.50@4700.42,8049.89 ccw(c4743.26,8039.12) 4712.02,8007.88 cw(c4743.26,8039.12) P4.50@4700.42,8049.89 ; P4.50@4710.12,8047.46 ccw(c4763.19,8034.11) 4724.49,7995.42 cw(c4763.19,8034.11) P4.50@4710.12,8047.46 ; P4.50@4719.82,8045.02 ccw(c4783.11,8029.1) 4736.96,7982.95 cw(c4783.11,8029.1) P4.50@4719.82,8045.02
  Bottom Layer w10: v4@4599,7509 C7.2@4778,7509 4778,7624 ; L4.1@4668,7651 C6.2@4804,7651 ; C6.2@4781.12,7642.03 cw(c4759.28,7631.08) 4780.44,7618.86 cw(c4801.6,7606.64) C6.2@4800.17,7631.03 ; C6.2@4782.6,7639.55 cw(c4756.8,7621.53) 4784.05,7605.8 ; C6.2@4787.37,7634.73 cw(c4775.43,7618.03) 4792.39,7606.45 ; C6.2@4790.8,7645.27 cw(c4771.03,7631.47) 4791.91,7619.41 ; C6.2@4793.19,7642.86 cw(c4781.38,7626.34) 4798.15,7614.89 ; 4794.88,7624.55 cw(c4808.14,7616.9) C6.2@4804.18,7631.68 ; 4803.91,7623.33 ccw(c4787.32,7634.66) C6.2@4799,7651 ; C6.2@4805,7651 4778,7624 ; 4699.54,7509 cw(c4699.54,7430.54) 4755.02,7486.02 ccw(c4699.54,7430.54) 4699.54,7509 ; 4699.54,7509 ccw(c4699.54,7587.46) 4755.02,7531.98 cw(c4699.54,7587.46) 4699.54,7509 ; 4723.68,7509 cw(c4723.68,7454.68) 4762.09,7493.09 ccw(c4723.68,7454.68) 4723.68,7509 ; 4723.68,7509 ccw(c4723.68,7563.32) 4762.09,7524.91 cw(c4723.68,7563.32) 4723.68,7509 ; 4750.72,7651 cw(c4750.72,7602.72) 4784.86,7636.86 ccw(c4750.72,7602.72) 4750.72,7651 ; 4750.72,7651 ccw(c4750.72,7699.28) 4784.86,7665.14 cw(c4750.72,7699.28) 4750.72,7651 ; 4778,7570.82 cw(c4723.68,7570.82) 4762.09,7532.41 ccw(c4723.68,7570.82) 4778,7570.82 ; 4778,7570.82 ccw(c4832.32,7570.82) 4793.91,7532.41 cw(c4832.32,7570.82) 4778,7570.82 ; 4778,7594.96 cw(c4699.54,7594.96) 4755.02,7539.48 ccw(c4699.54,7594.96) 4778,7594.96 ; 4778,7594.96 ccw(c4856.46,7594.96) 4800.98,7539.48 cw(c4856.46,7594.96) 4778,7594.96 ; 4778,7624 cw(c4795.28,7606.73) 4797.32,7631.07 ccw(c4795.28,7606.73) 4778,7624 ; 4778,7624 ccw(c4766.77,7635.23) 4781.04,7642.21 cw(c4766.77,7635.23) 4778,7624 ; 4779.96,7566.59 cw(c4753.97,7570.08) 4764.7,7546.15 ccw(c4753.97,7570.08) 4779.96,7566.59 ; 4779.96,7566.59 ccw(c4799.34,7563.98) 4791.32,7546.14 cw(c4799.34,7563.98) 4779.96,7566.59 ; C6.2@4799,7651 ccw(c4849.7,7600.3) 4778,7600.3 cw(c4849.7,7600.3) C6.2@4799,7651 ; L4.1@4679.07,7659.07 ccw(c4698.56,7678.56) 4698.56,7651 cw(c4698.56,7678.56) L4.1@4679.07,7659.07 ; L4.1@4686.14,7637.86 cw(c4717.87,7606.13) 4717.87,7651 ccw(c4717.87,7606.13) L4.1@4686.14,7637.86 ; L4.1@4686.14,7666.14 ccw(c4722.7,7702.7) 4722.7,7651 cw(c4722.7,7702.7) L4.1@4686.14,7666.14 ; C7.2@4778,7552.02 cw(c4897.98,7552.02) 4813.14,7636.86 ccw(c4897.98,7552.02) C7.2@4778,7552.02 ; 4778,7576.16 cw(c4873.84,7576.16) 4806.07,7643.93 ccw(c4873.84,7576.16) 4778,7576.16 ; 4778,7624.44 cw(c4825.56,7624.44) 4791.93,7658.07 ccw(c4825.56,7624.44) 4778,7624.44
  other v4: 4600,7509
VSSA: C5.2 L3.1 L4.2 P4.51 U3.30 | length 3522.3
  Top Layer w10: U3.30@4349,6546 4423.09,6546 4619,6741.91 4619,7769 P4.51@4800,7950 ; 4760.98,7909.11 ccw(c4747.12,7960.83) P4.51@4799.58,7950.09 ; 4776.61,7913.3 ccw(c4764.85,7957.2) P4.51@4809.37,7948.08 ; 4748.05,7898.05 cw(c4800,7846.1) 4800,7919.57 ccw(c4800,7846.1) 4748.05,7898.05 ; 4748.05,7898.05 ccw(c4696.1,7950) 4769.57,7950 cw(c4696.1,7950) 4748.05,7898.05 ; 4765.12,7915.12 cw(c4800,7880.24) 4800,7929.57 ccw(c4800,7880.24) 4765.12,7915.12 ; 4765.12,7915.12 ccw(c4730.24,7950) 4779.57,7950 cw(c4730.24,7950) 4765.12,7915.12
  Bottom Layer w10: L4.2@4577,7652 4577,7778 L3.1@4578,7779 ; L3.1@4579,7780 4625,7734 4847,7734 C5.2@4894,7781 ; L3.1@4584,7780 cw(c4572.75,7741.44) 4611.55,7751.84 ; L3.1@4586.8,7789.6 cw(c4578.57,7761.4) L3.1@4606.95,7769 ; 4861.45,7752.84 cw(c4900.25,7742.44) C5.2@4889,7781 ; C5.2@4866.05,7770 cw(c4894.43,7762.4) C5.2@4886.2,7790.6 ; 4577,7700.28 cw(c4528.72,7700.28) 4562.86,7666.14 ccw(c4528.72,7700.28) 4577,7700.28 ; 4577,7700.28 ccw(c4625.28,7700.28) 4591.14,7666.14 cw(c4625.28,7700.28) 4577,7700.28 ; L3.1@4564.86,7765.86 cw(c4535.54,7736.54) 4577,7736.54 ccw(c4535.54,7736.54) L3.1@4564.86,7765.86 ; 4577,7726.89 cw(c4632.11,7726.89) 4593.14,7765.86 ccw(c4632.11,7726.89) 4577,7726.89 ; 4577,7751.03 cw(c4607.97,7751.03) 4586.07,7772.93 ccw(c4607.97,7751.03) 4577,7751.03 ; L3.1@4584,7760 cw(c4584,7723.79) 4609.61,7749.39 ccw(c4584,7723.79) L3.1@4584,7760 ; L3.1@4594,7780 ccw(c4630.21,7780) 4604.61,7754.39 cw(c4630.21,7780) L3.1@4594,7780 ; L3.1@4604,7780 ccw(c4664.36,7780) 4621.68,7737.32 cw(c4664.36,7780) L3.1@4604,7780 ; 4851.32,7738.32 ccw(c4808.64,7781) 4869,7781 cw(c4808.64,7781) 4851.32,7738.32 ; 4863.39,7750.39 cw(c4889,7724.79) 4889,7761 ccw(c4889,7724.79) 4863.39,7750.39 ; 4868.39,7755.39 ccw(c4842.79,7781) 4879,7781 cw(c4842.79,7781) 4868.39,7755.39
YOUTPUT1: P14.2 U?.1 U?.2 | length 492.1
  Top Layer w30: U?.2@6509.47,5078 6509.47,5028.47 6861.53,5028.47 P14.2@6878,5012 ; 6806.85,5028.47 cw(c6806.85,4942.85) P14.2@6867.39,5003.39
YOUTPUT2: P16.2 U?.6 U?.7 | length 530
  Top Layer w30: P16.2@5918,5015 5922,5015 5985,5078 U?.7@6318.53,5078 ; P16.2@5920,5028 ccw(c5920,5064.21) 5945.61,5038.61 ccw(c5971.21,5013) P16.2@5935,5013 ; U?.7@6318.53,5081.53 U?.6@6318.53,5128
pads on no net: BT1. J2.17 K1.1 K1.4 K1.5 K1.6 LCD.32 U1.4 U2.9 U2.10 U2.11 U2.12 U2.15 U3.106 U4.5 U5.5 U6.5 U7.5 U8.GND USB_1.4 USB_1.6 USB_1.7 USB_1.8 USB_1.9 USB_1.MH1 USB_1.MH2 X1.2 X1.3 X2. Y1.

## Polygon pours and split planes (outlines as drawn)
GND on Top Layer "Bottom Layer-No Net" (solid, remove dead copper, pour order 9): 5769,8243 5769,4088 8894,4088 9441,4635 10196,5390 10196,8312
GND on Top Layer "Bottom Layer-No Net" (solid, remove dead copper, pour order 7): 1745,8425 5584,8425 5744,8265 5755,8254 5755,4319 2106,4319 1500,3713
GND on Bottom Layer "Bottom Layer-No Net" (solid, remove dead copper, pour order 13): 5769,8208 5839,8278 9516,8278 9516,4269 9357,4110 9060,4407 5767,4407
GND on Bottom Layer "Bottom Layer-No Net" (solid, remove dead copper, pour order 11): 1566,8506 5459,8506 5753,8212 5758,8207 5758,4437 2071,4437 1907,4273

## Keep-outs
Keep-Out Layer:
  lines w10: 9124,4500 2220,4500 cw(c2220,4600) 2120,4600 2120,8050 cw(c2220,8050) 2220,8150 9127,8150 ; 9127,4500 ccw(c9127,4600) 9227,4600 ; 9128,8150 cw(c9128,8050) 9228,8050 ; 9228,4598 9228,8048

## Silkscreen, mask and mechanical layers (free items; w line width, h text height)
Top Overlay:
  text "BUCK1" at 6414,8086 h60
  text "BUCK2" at 7712,8086 h60
  text "输出" at 6001,8068 h60
  text "输出" at 9069,8063 h60
  text "输入" at 8209,8058 h60
  text "+" at 5920,8056 h60
  text "输入" at 6885,8053 h60
  text "输出" at 7324,8053 h60
  text "+" at 9008,8048 h60
  text "+" at 8327,8045 h60
  text "+" at 7254,8041 h60
  text "+" at 7010,8040 h60
  text "VREF-/VREF+" at 4690,7892 h30 r270
  text "PD14/PD15" at 2489,7891 h30 r270
  text "PD12/PD13" at 2590,7891 h30 r270
  text "PD10/PD11" at 2689,7891 h30 r270
  text "PB14/PB15" at 2889,7891 h30 r270
  text "PB10/PB11" at 3092,7891 h30 r270
  text "PE14/PE15" at 3189,7891 h30 r270
  text "PE12/PE13" at 3290,7891 h30 r270
  text "PF13/PF14" at 3788,7891 h30 r270
  text "PB12/PB13" at 2987,7890 h30 r270
  text "PE8/PE9" at 3489,7890 h30 r270
  text "PG1/PE7" at 3589,7890 h30 r270
  text "PF15/PG0" at 3689,7890 h30 r270
  text "PB1/BOOT1" at 3990,7890 h30 r270
  text "PC1/PC2" at 4890,7890 h30 r270
  text "PD8/PD9" at 2793,7889 h30 r270
  text "PF10/PC0" at 4990,7889 h30 r270
  text "PG4/5" at 2290,7888 h30 r270
  text "PE10/PE11" at 3392,7888 h30 r270
  text "PF11/PF12" at 3892,7888 h30 r270
  text "PC5/PB0" at 4087,7888 h30 r270
  text "PA7/PC4" at 4191,7888 h30 r270
  text "VDDA/PA0" at 4583,7888 h30 r270
  text "PC3/VSSA" at 4788,7888 h30 r270
  text "PF8/PF9" at 5085,7887 h30 r270
  text "PG2/3" at 2388,7886 h30 r270
  text "PA5/PA6" at 4288,7886 h30 r270
  text "PA3/PA4" at 4389,7884 h30 r270
  text "PA1/PA2" at 4487,7883 h30 r270
  text "5V/GND" at 5182,7882 h30 r270
  text "BOOST1" at 9144,7376 h60 r90
  text "燕山大学" at 6564,6936 h300
  text "输入" at 9084,6853 h60
  text "+" at 9013,6841 h60
  text "输出" at 9069,6607 h60
  text "太阳能充电" at 6386,6596 h300
  text "+" at 9002,6595 h60
  text "2015.12.13" at 7674,6370 h100
  text "BUCK1" at 5938,6202 h60 r90
  text "BUCK2" at 6040,6199 h60 r90
  text "BOOST1" at 6148,6199 h60 r90
  text "BOOST2" at 6241,6197 h60 r90
  text "BOOST2OUT" at 7070,6127 h60 r90
  text "BOOST2IN" at 7173,6127 h60 r90
  text "BOOST1IN" at 6973,6125 h60 r90
  text "BOOST1OUT" at 6870,6123 h60 r90
  text "BUCK1OUT" at 6463,6122 h60 r90
  text "BUCK1IN" at 6567,6122 h60 r90
  text "BUCK2IN" at 6766,6122 h60 r90
  text "BUCK2OUT" at 6666,6120 h60 r90
  text "1" at 5410,5983 h60
  text "2" at 5512,5983 h60
  text "BOOST1" at 9137,5915 h60 r90
  text "电压采样" at 6674,5904 h60
  text "PC8" at 6140,5881 h60 r90
  text "PC7" at 6041,5879 h60 r90
  text "PC9" at 6241,5879 h60 r90
  text "PC6" at 5934,5876 h60 r90
  text "I2" at 6543,5803 h60 r90
  text "I1" at 6439,5802 h60 r90
  text "5.0" at 6340,5794 h60 r90
  text "huoer1" at 5968,5642 h60
  text "huoer2" at 6925,5642 h60
  text "电流采样" at 6327,5617 h60
  text "输入" at 9075,5404 h60
  text "+" at 9004,5395 h60
  text "PF3/PF2" at 5011,4764 h30 r90
  text "PF5/PF4" at 5112,4763 h30 r90
  text "KEY0/1" at 5211,4763 h30 r90
  text "PG7/PG6" at 2418,4762 h30 r90
  text "PC6/PG8" at 2517,4761 h30 r90
  text "PB5/PB4" at 4109,4761 h30 r90
  text "PF1/PF0" at 4910,4761 h30 r90
  text "PC8/PC7" at 2615,4760 h30 r90
  text "PA8/PC9" at 2718,4760 h30 r90
  text "PA14/PA13" at 3011,4760 h30 r90
  text "PD3/PD2" at 3409,4760 h30 r90
  text "PB9/PB8" at 4311,4760 h30 r90
  text "PC13/PE6" at 4711,4760 h30 r90
  text "PC15/PC14" at 4810,4760 h30 r90
  text "PA10/PA9" at 2814,4759 h30 r90
  text "PA12/PA11" at 2913,4759 h30 r90
  text "PD5/PD4" at 3509,4759 h30 r90
  text "PC10/PA15" at 3113,4758 h30 r90
  text "PC12/PA11" at 3212,4758 h30 r90
  text "PD1/PD0" at 3308,4758 h30 r90
  text "PD7/PD6" at 3609,4758 h30 r90
  text "PG10/PG9" at 3711,4758 h30 r90
  text "PG12/PG11" at 3813,4758 h30 r90
  text "PG14/PG13" at 3908,4758 h30 r90
  text "PB7/PB6" at 4212,4758 h30 r90
  text "PE1/PE0" at 4412,4758 h30 r90
  text "PE3/PE2" at 4512,4758 h30 r90
  text "PE5/PE4" at 4614,4758 h30 r90
  text "PB3/PG15" at 4011,4757 h30 r90
  text "+" at 8239,4549 h60

## Text inside footprints (layer, text, board x,y; h text height)
P2: Top Overlay "7.2" at 8324,5046 h30
U3: Top Overlay "109" at 3504,5875 h30; Top Overlay "144" at 4283,5872 h30; Top Overlay "108" at 3458,5927 h30; Top Overlay "73" at 3477,6678 h30; Top Overlay "37" at 4289,6736 h30; Top Overlay "36" at 4330,6685 h30; Top Overlay "1" at 4349,5936 h30; Top Overlay "72" at 3520,6735 h30